# Altium PCB 物联网温度实时监测设备.PcbDoc
Units mm, origin at the board's own origin, x right, y up, seen from the top; angles counter-clockwise.
Board outline 72.25 x 44.68 mm, 2 copper layers (Top Layer, Bottom Layer); 68 components, 49 nets, 275 pads, 138 vias.
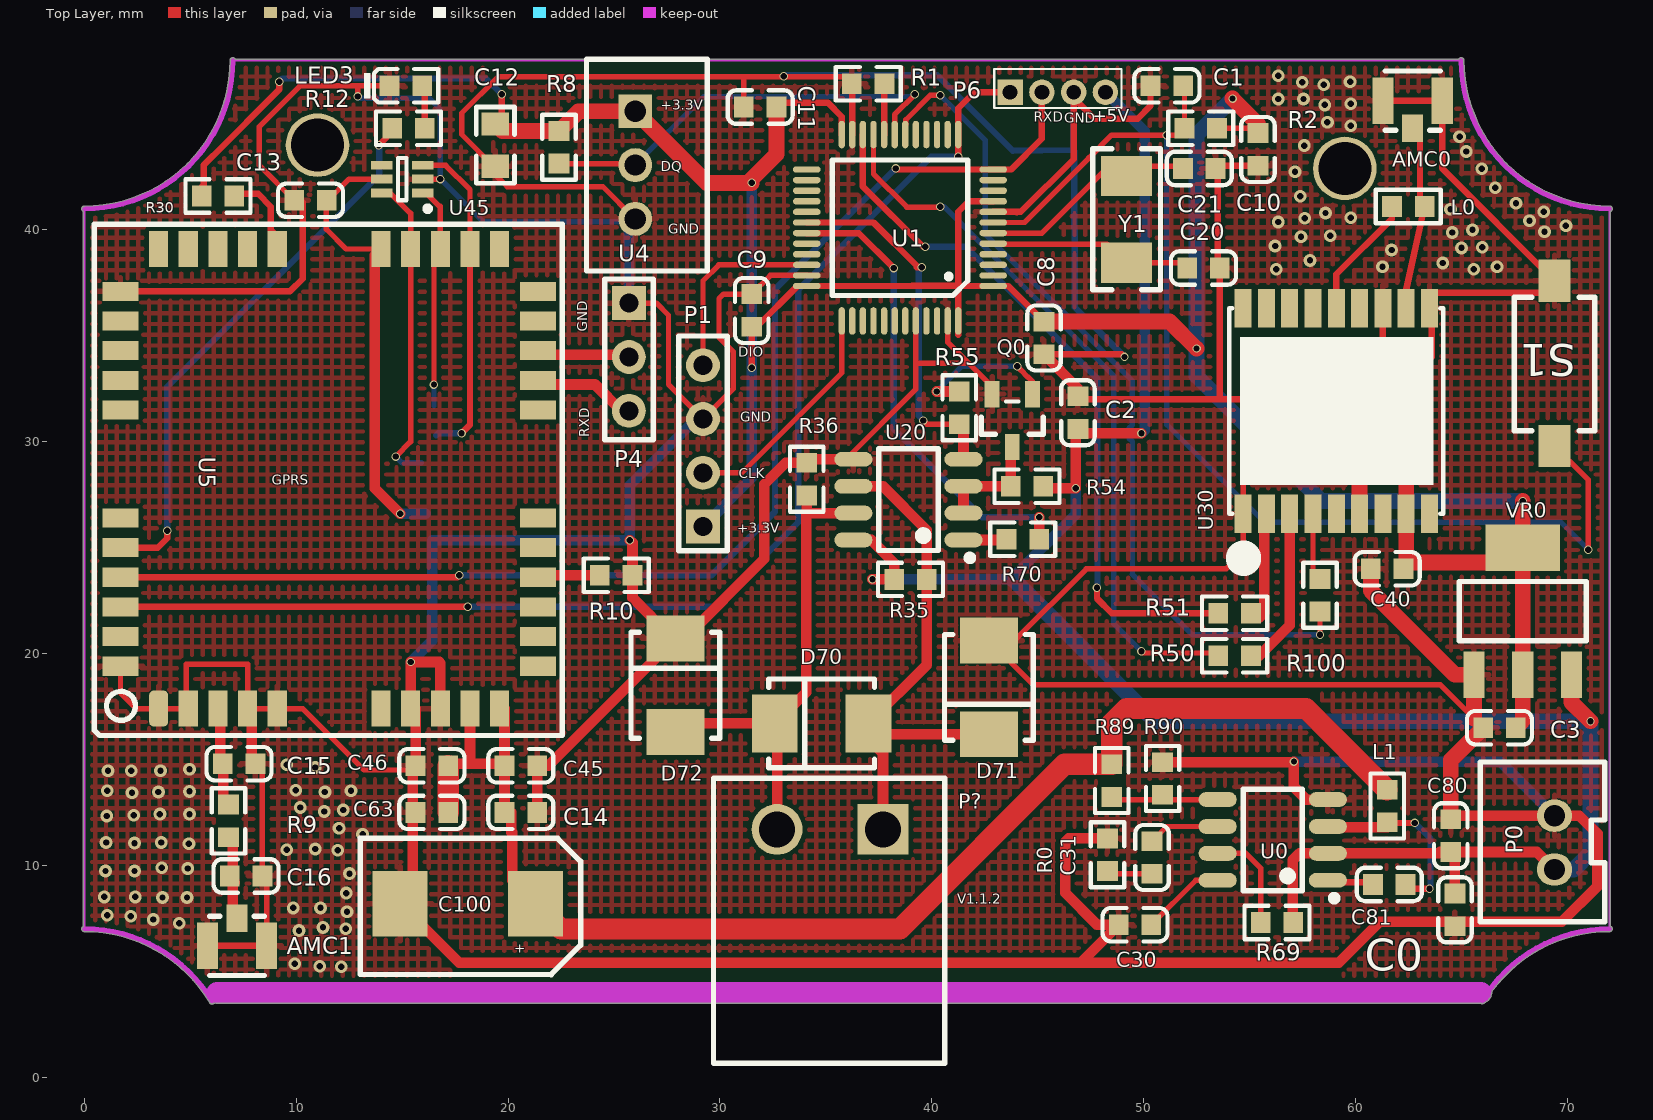
[diagram p0: Top Layer view]
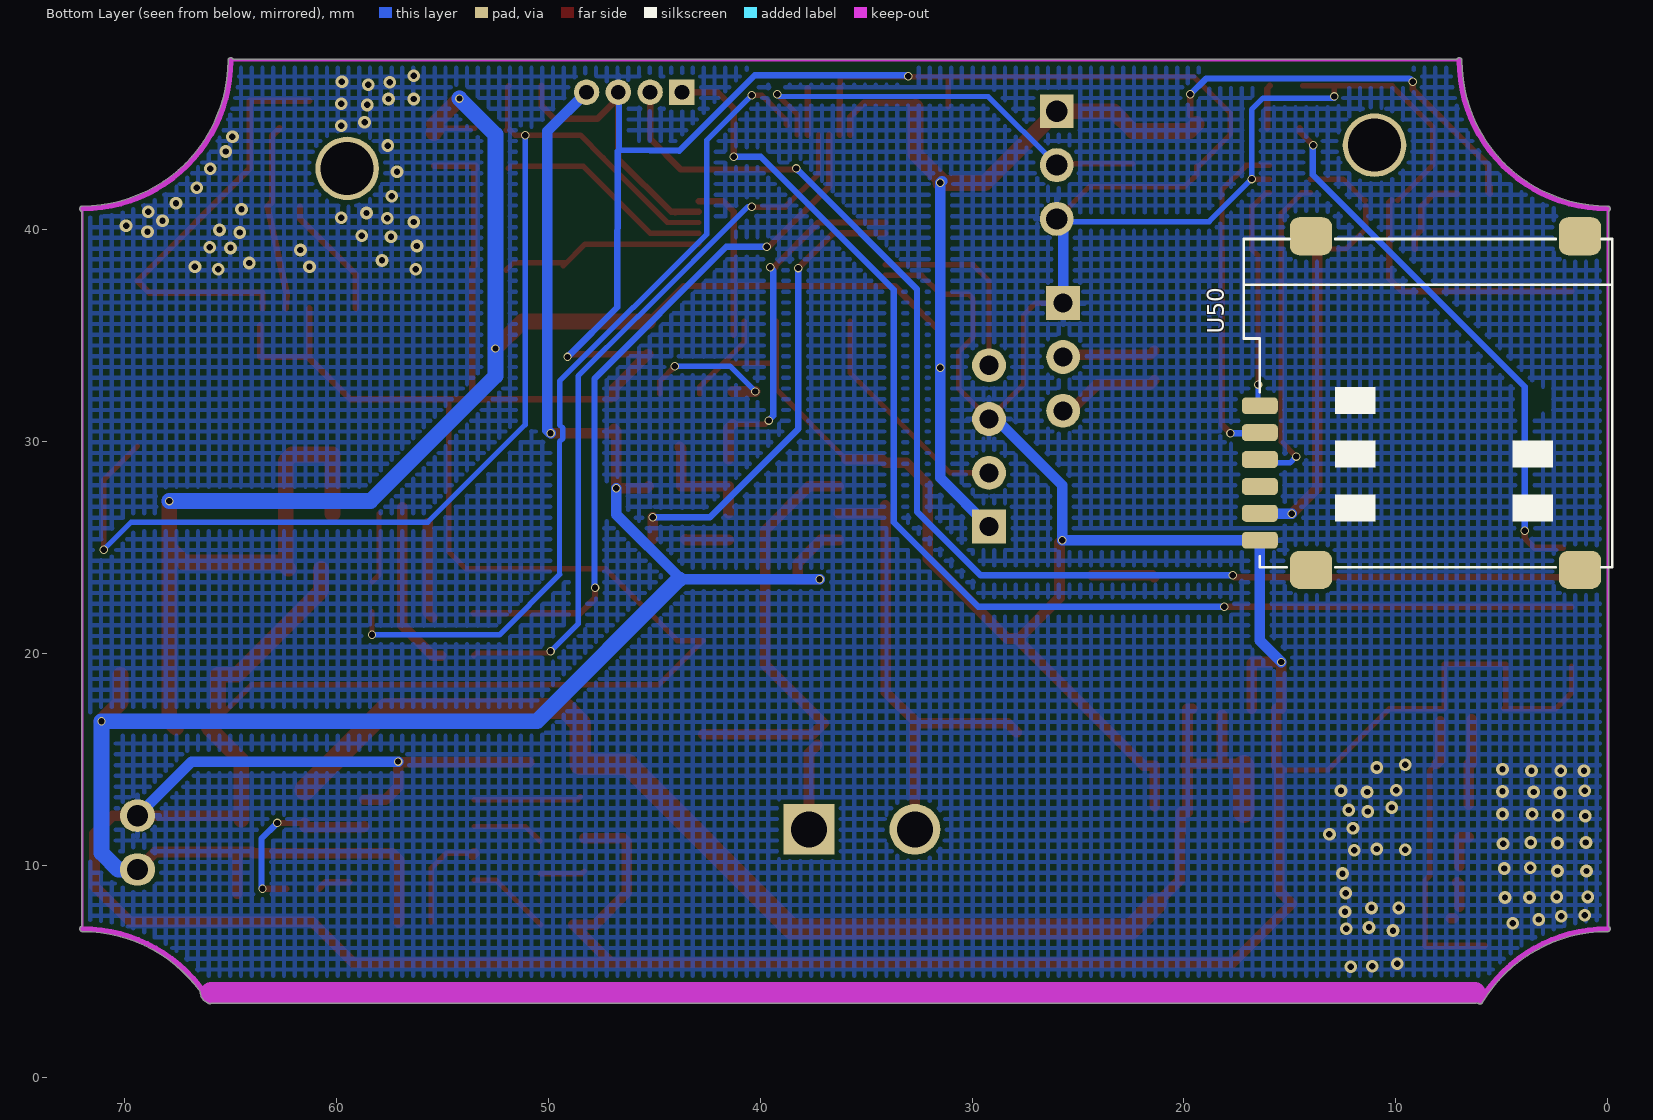
[diagram p1: Bottom Layer view, seen from below]

## Layer stack, top to bottom
Top Solder: solder mask 0.0102, Solder Resist, Dk 3.5
Top Layer: signal copper 0.0356
Dielectric 1: dielectric 0.32, FR-4, Dk 4.8
Bottom Layer: signal copper 0.0356
Bottom Solder: solder mask 0.0102, Solder Resist, Dk 3.5

## Board outline
0,6.873 cw(c0,0) 5.906,3.514 ccw(c6.016,3.579) 6.122,3.509 ccw(c6.26,3.99) 6.26,3.49 65.915,3.49 ccw(c65.991,3.591) 66.095,3.518 ccw(c65.93,3.99) 66.43,3.99 ccw(c65.93,3.99) 66.429,4.025 cw(c72,0) 72,6.873 ccw(c72,7) 72.127,7 ccw(c72,7) 72.04,7.121 72.04,40.879 ccw(c72,41) 72.127,41 ccw(c72,41) 72,41.127 cw(c72,48) 65.127,48 ccw(c65,48) 64.883,48.05 7.117,48.05 ccw(c7,48) 6.873,48 cw(c0,48) 0,41.127 ccw(c0,41) -0.05,40.883 -0.05,7.117 ccw(c0,7)

## Design rules (kind name [scope] priority, off if disabled: settings)
AssemblyTestPointUsage [All] p0: scope1count=1 scope1_0_kind=Board scope1_0_value=Board scope2count=1 scope2_0_kind=Board scope2_0_value=Board commentlength=0
AssemblyTestpoint [All] p0: scope1count=1 scope1_0_kind=Board scope1_0_value=Board scope2count=1 scope2_0_kind=Board scope2_0_value=Board commentlength=0
Clearance [All] p0: scope1count=1 scope1_0_kind=Board scope1_0_value=Board scope2count=1 scope2_0_kind=Board scope2_0_value=Board commentlength=0 gap=0.2
Clearance [All] p1: gap=0.2
ComponentClearance [All] p0: scope1count=1 scope1_0_kind=Board scope1_0_value=Board scope2count=1 scope2_0_kind=Board scope2_0_value=Board commentlength=0 gap=0.254 collisioncheckmode=3
DiffPairsRouting [All] p0: scope1count=1 scope1_0_kind=Board scope1_0_value=Board scope2count=1 scope2_0_kind=Board scope2_0_value=Board commentlength=0
FabricationTestPointUsage [All] p0: scope1count=1 scope1_0_kind=Board scope1_0_value=Board scope2count=1 scope2_0_kind=Board scope2_0_value=Board commentlength=0 valid=0 allowmultiple=FALSE
FabricationTestpoint [All] p0: scope1count=1 scope1_0_kind=Board scope1_0_value=Board scope2count=1 scope2_0_kind=Board scope2_0_value=Board commentlength=0 side=3 testpointundercomponent=TRUE minsize=1.016 maxsize=2.54 preferedsize=1.524 minholesize=0 maxholesize=1.016 preferedholesize=0.813 testpointgrid=0.025
FanoutControl Fanout_BGA [All] p0 off: scope1count=1 scope1_0_kind=Board scope1_0_value=Board scope2count=1 scope2_0_kind=Board scope2_0_value=Board commentlength=69 // Protel DXP Scope 1 Expression Was: IsBGA   Fanout_BGA (Default Rule)
FanoutControl Fanout_LCC [All] p0 off: scope1count=1 scope1_0_kind=Board scope1_0_value=Board scope2count=1 scope2_0_kind=Board scope2_0_value=Board commentlength=69 // Protel DXP Scope 1 Expression Was: IsLCC   Fanout_LCC (Default Rule)
FanoutControl Fanout_SOIC [All] p0 off: scope1count=1 scope1_0_kind=Board scope1_0_value=Board scope2count=1 scope2_0_kind=Board scope2_0_value=Board commentlength=71 // Protel DXP Scope 1 Expression Was: IsSOIC   Fanout_SOIC (Default Rule)
FanoutControl Fanout_Small [All] p0 off: scope1count=1 scope1_0_kind=Board scope1_0_value=Board scope2count=1 scope2_0_kind=Board scope2_0_value=Board commentlength=84 // Protel DXP Scope 1 Expression Was: (CompPinCount < 5)   Fanout_Small (Default Rule)
FanoutControl Fanout_Default [All] p0: scope1count=1 scope1_0_kind=Board scope1_0_value=Board scope2count=1 scope2_0_kind=Board scope2_0_value=Board commentlength=30 // Fanout_Default (Default Rule)
Height [All] p0: scope1count=1 scope1_0_kind=Board scope1_0_value=Board scope2count=1 scope2_0_kind=Board scope2_0_value=Board commentlength=0
HoleSize [All] p0: scope1count=1 scope1_0_kind=Board scope1_0_value=Board scope2count=1 scope2_0_kind=Board scope2_0_value=Board commentlength=0 absolutevalues=TRUE maxlimit=2.54 minlimit=0.025 maxpercent=80.000 minpercent=20.000
HoleToHoleClearance [All] p0: scope1count=1 scope1_0_kind=Board scope1_0_value=Board scope2count=1 scope2_0_kind=Board scope2_0_value=Board commentlength=0
LayerPairs [All] p0: scope1count=1 scope1_0_kind=Board scope1_0_value=Board scope2count=1 scope2_0_kind=Board scope2_0_value=Board commentlength=0 enforce=TRUE
MinimumSolderMaskSliver [All] p0: scope1count=1 scope1_0_kind=Board scope1_0_value=Board scope2count=1 scope2_0_kind=Board scope2_0_value=Board commentlength=0
NetAntennae [All] p0: scope1count=1 scope1_0_kind=Board scope1_0_value=Board scope2count=1 scope2_0_kind=Board scope2_0_value=Board commentlength=0
PasteMaskExpansion [All] p0: scope1count=1 scope1_0_kind=Board scope1_0_value=Board scope2count=1 scope2_0_kind=Board scope2_0_value=Board commentlength=0 expansion=0
PlaneClearance [All] p0: scope1count=1 scope1_0_kind=Board scope1_0_value=Board scope2count=1 scope2_0_kind=Board scope2_0_value=Board commentlength=0 clearance=0.508
PlaneConnect [All] p0: scope1count=1 scope1_0_kind=Board scope1_0_value=Board scope2count=1 scope2_0_kind=Board scope2_0_value=Board commentlength=0 planeconnectstyle=Relief reliefexpansion=0.508 reliefentries=4 reliefconductorwidth=0.254 reliefairgap=0.254
PolygonConnect [All] p0 off: scope1count=1 scope1_0_kind=Board scope1_0_value=Board scope2count=1 scope2_0_kind=Board scope2_0_value=Board commentlength=44 connectstyle=Direct reliefconductorwidth=0.254 reliefentries=4 polygonreliefangle="90 Angle" // Protel DXP Scope 1 Expression Was: IsVia
PolygonConnect [IsVia] p1: connectstyle=Direct reliefconductorwidth=0.254 reliefentries=4 polygonreliefangle="90 Angle" airgapwidth=0.254
RoutingCorners [All] p0: scope1count=1 scope1_0_kind=Board scope1_0_value=Board scope2count=1 scope2_0_kind=Board scope2_0_value=Board commentlength=0 cornerstyle=45-Degree minsetback=2.54 maxsetback=2.54
RoutingLayers [All] p0: scope1count=1 scope1_0_kind=Board scope1_0_value=Board scope2count=1 scope2_0_kind=Board scope2_0_value=Board commentlength=0 top layer=Automatic bottom layer=Automatic
RoutingPriority [All] p0: scope1count=1 scope1_0_kind=Board scope1_0_value=Board scope2count=1 scope2_0_kind=Board scope2_0_value=Board commentlength=0
RoutingTopology [All] p0: scope1count=1 scope1_0_kind=Board scope1_0_value=Board scope2count=1 scope2_0_kind=Board scope2_0_value=Board commentlength=0 topology=Shortest
RoutingVias [All] p0: scope1count=1 scope1_0_kind=Board scope1_0_value=Board scope2count=1 scope2_0_kind=Board scope2_0_value=Board commentlength=0 holewidth=0.3 width=0.4 viastyle="Through Hole" minholewidth=0.3 minwidth=0.4 maxholewidth=0.711 maxwidth=1.27
RoutingVias [All] p1: holewidth=0.3 width=0.4 viastyle="Through Hole" minholewidth=0.3 minwidth=0.4 maxholewidth=0.711 maxwidth=1.27
ShortCircuit [All] p0: scope1count=1 scope1_0_kind=Board scope1_0_value=Board scope2count=1 scope2_0_kind=Board scope2_0_value=Board commentlength=0 allowed=FALSE
SilkToBoardRegionClearance [All] p0: scope1count=1 scope1_0_kind=Board scope1_0_value=Board scope2count=1 scope2_0_kind=Board scope2_0_value=Board commentlength=0
SilkToSilkClearance [All] p0: scope1count=1 scope1_0_kind=Board scope1_0_value=Board scope2count=1 scope2_0_kind=Board scope2_0_value=Board commentlength=0
SilkToSilkClearance [All] p1: silktosilkclearance=0.01
SilkToSolderMaskClearance [All] p0 off: scope1count=1 scope1_0_kind=Board scope1_0_value=Board scope2count=1 scope2_0_kind=Board scope2_0_value=Board commentlength=44 // Protel DXP Scope 1 Expression Was: IsPad
SilkToSolderMaskClearance [IsPad] p1: minsilkscreentomaskgap=0.01 clearancetoexposedcopper=TRUE
SolderMaskExpansion [All] p0: scope1count=1 scope1_0_kind=Board scope1_0_value=Board scope2count=1 scope2_0_kind=Board scope2_0_value=Board commentlength=0 expansion=0.102
SolderMaskExpansion [All] p1: expansion=0.102
UnRoutedNet [All] p0: scope1count=1 scope1_0_kind=Board scope1_0_value=Board scope2count=1 scope2_0_kind=Board scope2_0_value=Board commentlength=0
UnpouredPolygon [All] p0: scope1count=1 scope1_0_kind=Board scope1_0_value=Board scope2count=1 scope2_0_kind=Board scope2_0_value=Board commentlength=0
Width [All] p0: scope1count=1 scope1_0_kind=Board scope1_0_value=Board scope2count=1 scope2_0_kind=Board scope2_0_value=Board commentlength=0 maxlimit=2 minlimit=0.254 preferedwidth=0.254
Width [All] p1: maxlimit=2 minlimit=0.254 preferedwidth=0.254
28 further rules are at their usual default settings.

## Components (designator, comment, footprint, x,y, rotation, side; value= is the part's Value field where it differs from the comment)
AMC0 "Component_1" IPEX 62.7,46.1 r90 top
AMC1 "Component_1" IPEX 7.2,6.2 r270 top
C0 "1uF (105) 10% 50V" 0603_C#1 64.7,7.9 r90 top
C1 "100nF (104) 10% 50V" 0603_C#2 51.1,46.8 r0 top
C2 "100nF (104) 10% 50V" 0603_C#2 46.9,31.37 r90 top
C3 "100nF (104) 10% 50V" 0603_C#2 66.8,16.5 r0 top
C8 "100nF (104) 10% 50V" 0603_C#2 45.3,34.9 r90 top
C9 "100nF (104) 10% 50V" 0603_C#2 31.5,36.2 r270 top
C10 "100nF (104) 10% 50V" 0603_C#2 55.4,43.8 r90 top
C11 "100nF (104) 10% 50V" 0603_C#2 31.9,45.8 r0 top
C12 "100nF(104) 10% 50V" CAPC_0805 19.4,44 r90 top
C13 "1uF (105) 10% 50V" 0603_C#2 10.67,41.4 r0 top
C14 "10nF (103) 10% 50V" 0603_C#2 20.6,12.5 r180 top
C15 "1uF (105) 10% 50V" 0603_C#2 7.3,14.8 r180 top
C16 "1uF (105) 10% 50V" 0603_C#2 7.63,9.5 r180 top
C20 "20pF (200) 5% 50V" 0603_C#2 52.83,38.2 r180 top
C21 "20pF (200) 5% 50V" 0603_C#2 52.63,42.9 r180 top
C30 "3.3nF (332) 10% 50V" 0603_C#2 49.6,7.2 r0 top
C31 "3.3nF (332) 10% 50V" 0603_C#2 50.4,10.37 r270 top
C40 "10uF (106) 10% 10V" 0603_C#2 61.5,24 r180 top
C45 "100nF (104) 10% 50V" 0603_C#2 20.6,14.7 r180 top
C46 "10nF (103) 10% 50V" 0603_C#2 16.4,14.7 r0 top
C63 "22uF (226) 20% 6.3V" 0603_C#2 16.4,12.5 r180 top
C80 "10uF (106) 10% 10V" 0603_C#2 64.5,11.4 r270 top
C81 "10nF (103) 10% 50V" 0603_C#2 61.6,9.1 r180 top
C100 "Cap Pol1" C7361 18.1,8.2 r180 top
D70 "P6SMB6.8CA" SMB(DO-214AA)_S1 34.8,16.7 r0 top
D71 "P6SMB6.8CA" SMB(DO-214AA)_S1 42.7,18.4 r90 top
D72 "P6SMB6.8CA" SMB(DO-214AA)_S1 27.9,18.5 r270 top
L0 "47nH" 0603_L 62.5,41.1 r180 top
L1 "10uH ±10%" 0603_L 61.5,12.8 r270 top
LED3 "蓝灯 0603" 0603_LED_S1 15.17,46.8 r0 top
P0 "HDR-1X2" XH2.54-2 69.4,9.8 r270 top
P1 "SWD下载" "Header 2.54X4" 29.2,29.8 r90 top
P4 "Header 3" "Header 2.54X3" 25.7,34 r270 top
P6 "ZH1.5-4P" ZH1.5-4P 43.7,46.5 r0 top
P? "485接口" 2EDGK-2P 37.7,11.7 r180 top
Q0 "SS8050 Y1" SOT-23(SOT-23-3) 43.8,31 r90 top
R0 "5.6KΩ (5601) ±1%" 0603_R 48.3,10.5 r90 top
R1 "10KΩ (1002) ±1%" 0603_R 37,46.9 r180 top
R2 "10KΩ (1002) ±1%" 0603_R 52.7,44.8 r0 top
R8 "4.7KΩ (4701) ±1%" 0603_R 22.4,43.9 r270 top
R9 "0Ω (0R0) ±1%" 0603_R 6.8,12.1 r270 top
R10 "1KΩ (1001) ±1%" 0603_R 25.1,23.7 r0 top
R12 "20Ω (20R0) ±1%" 0603_R 15.3,44.8 r0 top
R30 "10KΩ (1002) ±1%" 0603_R 6.3,41.6 r0 top
R35 "4.7KΩ (4701) ±1%" 0603_R 39,23.5 r0 top
R36 "4.7KΩ (4701) ±1%" 0603_R 34.1,28.23 r90 top
R50 "0Ω (0R0) ±1%" 0603_R 54.3,19.9 r180 top
R51 "0Ω (0R0) ±1%" 0603_R 54.3,21.9 r180 top
R54 "4.7KΩ (4701) ±1%" 0603_R 44.5,27.9 r0 top
R55 "4.7KΩ (4701) ±1%" 0603_R 41.3,31.6 r90 top
R69 "100KΩ (1003) ±1%" 0603_R 56.3,7.3 r180 top
R70 "1KΩ (1001) ±1%" 0603_R 44.3,25.4 r180 top
R89 "33KΩ (3302) ±1%" 0603_R 48.5,14 r90 top
R90 "10KΩ (1002) ±1%" 0603_R 50.9,14.1 r270 top
R100 "0Ω (0R0) ±1%" 0603_R 58.33,22.75 r270 top
S1 "SW-PB" KEY-SMD1 69.4,29.8 r90 top
U0 "MP1482DS" SOIC-8_150mil 56.1,11.2 r90 top
U1 "STM32F103C8T6" LQFP_48_7X7 38.5,40.1 r90 top
U4 "DS18B20" XH_2.54_3P 26,43.06 r270 top locked
U5 "G510" G510 3.5,17.4 r0 top
U20 "SN75176BDR" SOIC-8_150mil 38.9,27.265 r90 top
U30 "GP-02" GP-02 59.1,31.45 r90 top
U45 "SMF05CT1G" SC-70-6(SOT-363) 15,42.4 r180 top
U50 "SIM_CARD" SIM_MICRO_6P 16.413,25.349 r90 bottom
VR0 "AMS1117-3.3" SOT-223 67.9,22 r270 top locked
Y1 "8MHz ±20ppm 20pF" SMD-5032_2P 49.2,40.5 r90 top

## Footprints (in the part's own frame and the unit in brackets; to place one, negate y for a bottom-side part, rotate by r counter-clockwise, add the part's x,y. Pads: shape width x height; smd on the part's side, far side on the other; paste and mask are expansions set on the pad)
2EDGK-2P [mm]
  rect 2.4x2.4 hole 1.7: 1(0,0)
  round 2.4 hole 1.7: 2(5,0)
  silkscreen extent -2.92,-2.41 8,11.05
0603_C#1 [mm]
  rect 0.93x0.98 smd: 1(-0.77,0) 2(0.77,0)
  Mechanical 13 keep-out region: 23.1,61.812 23.1,60.542 25.005,60.542 25.005,61.812
  silkscreen extent -1.53,-0.79 1.54,0.79
0603_C#2 [mm]
  rect 0.93x0.98 smd: 1(-0.77,0) 2(0.77,0)
  silkscreen extent -1.53,-0.79 1.54,0.79
0603_L [mm]
  rect 0.93x0.98 smd: 1(-0.77,0) 2(0.77,0)
  silkscreen extent -1.53,-0.79 1.54,0.79
0603_LED_S1 [mm]
  rect 0.93x0.98 smd: A(0.77,0) K(-0.77,0)
  silkscreen extent -1.98,-0.79 1.54,0.79
0603_R [mm]
  rect 0.93x0.98 smd: 1(-0.77,0) 2(0.77,0)
  silkscreen extent -1.53,-0.79 1.54,0.79
C7361 [mm] "D型"
  rect 2.6x3.1 smd: 1(-3.202,0.007) 2(3.198,0.007)
  silkscreen extent -5.33,-3.07 5.08,3.36
CAPC_0805 [mm]
  rect 1.1x1.3 smd: 1(-1,0) 2(1,0)
  silkscreen extent -1.8,-0.9 1.8,0.9
G510 [mm]
  rrect50% 0.9x1.7 smd: 1(0,0)
  rect 0.9x1.7 smd: 2(1.4,0) 3(2.8,0) 4(4.2,0) 5(5.6,0) 6(10.5,0) 7(11.9,0) 8(13.3,0) 9(14.7,0) 10(16.1,0) 22(16.1,21.7) 23(14.7,21.7) 24(13.3,21.7) 25(11.9,21.7) 26(10.5,21.7) 27(5.6,21.7) 28(4.2,21.7) 29(2.8,21.7) 30(1.4,21.7) 31(0,21.7)
  rect 1.7x0.9 smd: 11(17.9,2) 12(17.9,3.4) 13(17.9,4.8) 14(17.9,6.2) 15(17.9,7.6) 16(17.9,9) 17(17.9,14.1) 18(17.9,15.5) 19(17.9,16.9) 20(17.9,18.3) 21(17.9,19.7) 32(-1.8,19.7) 33(-1.8,18.3) 34(-1.8,16.9) 35(-1.8,15.5) 36(-1.8,14.1) 37(-1.8,9) 38(-1.8,7.6) 39(-1.8,6.2) 40(-1.8,4.8) 41(-1.8,3.4) 42(-1.8,2)
  silkscreen extent -3.05,-1.27 19.05,22.86
GP-02 [mm]
  rect 1.8x0.8 smd: 1(-4.85,4.4) 2(-4.85,3.3) 3(-4.85,2.2) 4(-4.85,1.1) 5(-4.85,0) 6(-4.85,-1.1) 7(-4.85,-2.2) 8(-4.85,-3.3) 9(-4.85,-4.4) 10(4.85,-4.4) 11(4.85,-3.3) 12(4.85,-2.2) 13(4.85,-1.1) 14(4.85,0) 15(4.85,1.1) 16(4.85,2.2) 17(4.85,3.3) 18(4.85,4.4)
  silkscreen extent -7.29,-5.05 4.85,5.05
"Header 2.54X3" [mm]
  rect 1.6x1.6 hole 0.9: 1(-2.54,0)
  round 1.6 hole 0.9: 2(0,0) 3(2.54,0)
  silkscreen extent -3.68,-1.14 3.9,1.14
"Header 2.54X4" [mm]
  rect 1.6x1.6 hole 0.9: 1(-3.81,0)
  round 1.6 hole 0.9: 2(-1.27,0) 3(1.27,0) 4(3.81,0)
  silkscreen extent -4.95,-1.14 5.19,1.14
IPEX [mm]
  rect 1.3x1 smd: 1(-1.3,0)
  rect 2.2x1 smd: 2(0,1.4) 2(0,-1.4)
  silkscreen extent -1.4,-1.3 1.4,1.3
KEY-SMD1 [mm]
  rect 2x1.5 smd: 1(0,0) 2(7.8,0)
  silkscreen extent 0.73,-1.9 7.03,1.9
LQFP_48_7X7 [mm]
  oval 0.3x1.3 smd: 1(-2.75,-4.4) 2(-2.25,-4.4) 3(-1.75,-4.4) 4(-1.25,-4.4) 5(-0.75,-4.4) 6(-0.25,-4.4) 7(0.25,-4.4) 8(0.75,-4.4) 9(1.25,-4.4) 10(1.75,-4.4) 11(2.25,-4.4) 12(2.75,-4.4) 25(2.75,4.4) 26(2.25,4.4) 27(1.75,4.4) 28(1.25,4.4) 29(0.75,4.4) 30(0.25,4.4) 31(-0.25,4.4) 32(-0.75,4.4) 33(-1.25,4.4) 34(-1.75,4.4) 35(-2.25,4.4) 36(-2.75,4.4)
  oval 1.3x0.3 smd: 13(4.4,-2.75) 14(4.4,-2.25) 15(4.4,-1.75) 16(4.4,-1.25) 17(4.4,-0.75) 18(4.4,-0.25) 19(4.4,0.25) 20(4.4,0.75) 21(4.4,1.25) 22(4.4,1.75) 23(4.4,2.25) 24(4.4,2.75) 37(-4.4,2.75) 38(-4.4,2.25) 39(-4.4,1.75) 40(-4.4,1.25) 41(-4.4,0.75) 42(-4.4,0.25) 43(-4.4,-0.25) 44(-4.4,-0.75) 45(-4.4,-1.25) 46(-4.4,-1.75) 47(-4.4,-2.25) 48(-4.4,-2.75)
  silkscreen extent -3.2,-3.2 3.2,3.2
SC-70-6(SOT-363) [mm]
  rect 1x0.42 smd mask+0: 1(-0.97,0.65) 2(-0.97,0) 3(-0.97,-0.65) 4(0.97,-0.65) 5(0.97,0) 6(0.97,0.65)
  silkscreen extent -1.33,-1 0.2,1.52
SIM_MICRO_6P [mm]
  rrect50% 0.8x1.7 smd: 1(1.27,0) 2(3.81,0) 3(6.35,0) 4(0,0) 5(2.54,0) 6(5.08,0)
  rrect50% 1.8x2 smd: 7(-1.397,-2.413) 8(14.351,-2.413) 9(-1.397,-15.113) 10(14.351,-15.113)
  silkscreen extent -1.27,-16.64 14.22,0.76
SMB(DO-214AA)_S1 [mm]
  rect 2.159x2.743 smd: 1(2.21,0) 2(-2.21,0)
  silkscreen extent -2.5,-2.1 2.5,2.1
SMD-5032_2P [mm]
  rect 1.9x2.4 smd: 1(-2.05,0) 2(2.05,0)
  silkscreen extent -3.32,-1.6 3.32,1.6
SOIC-8_150mil [mm]
  oval 0.7x1.8 smd: 1(-1.905,-2.6) 2(-0.635,-2.6) 3(0.635,-2.6) 4(1.905,-2.6) 5(1.905,2.6) 6(0.635,2.6) 7(-0.635,2.6) 8(-1.905,2.6)
  silkscreen extent -2.9,-3.05 2.4,1.4
SOT-23(SOT-23-3) [mm]
  rect 1.25x0.7 smd: 1(1.25,-0.95) 2(1.25,0.95) 3(-1.25,0)
  silkscreen extent -0.65,-1.46 0.9,1.46
SOT-223 [mm]
  rect 2.2x1 smd: 1(3,-2.3) 2(3,0) 3(3,2.3)
  rect 2.2x3.5 smd: 2(-3,0)
  silkscreen extent -1.4,-3 1.4,3
XH2.54-2 [mil]
  oval 60x65 hole 39.37: 1(0,0) 2(-100.1,0)
  silkscreen extent -200,-138 97,93
XH_2.54_3P [mm]
  rect 1.6x1.6 hole 1: 1(-2.54,0)
  round 1.6 hole 1: 2(0,0) 3(2.54,0)
  silkscreen extent -5,-2.3 5,3.4
ZH1.5-4P [mm] "ZH1.5-4P"
  rect 1.2x1.2 hole 0.7: 1(0,0)
  round 1.2 hole 0.7: 2(1.5,0) 3(3,0) 4(4.5,0)
  silkscreen extent -0.75,-0.75 5.25,1.1

## Part data
AMC0 AMC1: library part Component_1_2
C0 C13 C15 C16: library part "0603 1uF (105) 10% 50V", "贴片电容"
C1 C2 C3 C8 C9 C10 C11 C45: library part "0603 100nF (104) 10% 50V", "贴片电容"
C12: library part "0805 100nF(104) 10% 50V", "贴片电容"
C14 C46 C81: library part "0603 10nF (103) 10% 50V", "贴片电容"
C20 C21: library part "0603 20pF (200) 5% 50V", "贴片电容"
C30 C31: library part "0603 3.3nF (332) 10% 50V", "贴片电容"
C40 C80: library part "0603 10uF (106) 10% 10V", "贴片电容"
C63: library part "0603 22uF (226) 20% 6.3V", "贴片电容"
C100: "Polarized Capacitor (Radial)"
D70 D71 D72: library part "SMB/DO-214AA P6SMB6.8CA", "TVS"
L0: library part "0603 47nH", "贴片电感"
L1: library part "0603 10uH 10%", "贴片电感"
LED3: library part "0603 蓝灯", "发光二极管"
P0: library part "Header 2", "2P接插件"
P1: library part "Header 4", "Header, 4-Pin"
P4: "Header, 3-Pin"
P6: library part "Header 4", "4P接插件"
P?: library part "Header 2", "Header, 2-Pin"
Q0: library part "SOT-23 SS8050 Y1", "三极管"
R0: library part "0603 5.6KΩ (5601) 1%", "贴片电阻"
R1 R2 R30 R90: library part "0603 10KΩ (1002) 1%", "贴片电阻"
R8 R35 R36 R54 R55: library part "0603 4.7KΩ (4701) 1%", "贴片电阻"
R9 R50 R51 R100: library part "0603 0Ω (0R0) 1%", "贴片电阻"
R10 R70: library part "0603 1KΩ (1001) 1%", "贴片电阻"
R12: library part "0603 20Ω (20R0) 1%", "贴片电阻"
R69: library part "0603 100KΩ (1003) 1%", "贴片电阻"
R89: library part "0603 33KΩ (3302) 1%", "贴片电阻"
S1: library part SW-PB_1, "微动开关"
U0: library part MP1482DS_[C14867], "电源芯片"
U1: "ARM"
U4: library part Component_1_3
U5: library part Component_1_1
U20: library part SN75176BDR_[C7063], "RS-485/RS-422"
U45: library part SMF05CT1G_[C15879], "TVS"
VR0: library part "SOT-223 AMS1117-3.3", "低压差线性稳压(LDO)"
Y1: library part "SMD-5032_2P 8MHz 20ppm 20pF", "贴片晶振"

## Free pads (board coordinates)
  round 3 hole 2.5: 0(11,44) 0(59.5,42.9)

## Via types
v1: diameter 0.6, hole 0.3, Top Layer to Bottom Layer, 93 vias
v2: diameter 0.4, hole 0.3, Top Layer to Bottom Layer, 45 vias

## Nets (pads, with @x,y where several pads share a name; then routed paths per layer and width w, separated by ;. In a path a pad name is that pad's centre, name@x,y a point inside that pad or via, vN(x,y) a via of type N, cw(c..) or ccw(c..) an arc to the next point about the centre after c; other vN are vias at no path point)
1pps: R100.2 U1.18 | length 40.1
  Top Layer w0.254: U1.18@38.727,44.93 38.773,44.976 38.773,45.198 39.935,46.36 v2(40.4,46.36) ; v2(58.33,20.88) R100.2
  Bottom Layer w0.254: v2(40.4,46.36) 42.53,44.23 42.53,39.792 45.968,36.354 45.983,36.354 49.473,32.865 49.473,30.789 49.323,30.639 49.323,30.161 49.48,30.004 49.48,23.73 49.47,23.73 52.32,20.88 v2(58.33,20.88)
485_RXD: R55.1 U1.30 U20.4 | length 17.2
  Top Layer w0.254: v2(39.6,31) 39.77,30.83 R55.1
  Top Layer w0.3: U1.30 37.252,40.35 39.3,38.302 39.3,38.231 v2(39.531,38.231)
  Top Layer w0.5: R55.1 41.5,30.63 U20.4
  Bottom Layer w0.3: v2(39.531,38.231) 39.38,38.08 39.38,31.22 v2(39.6,31)
485_TXD: R70.1 U1.31 | length 22
  Top Layer w0.3: U1.31 36.55,39.85 v2(38.2,38.2)
  Top Layer w0.5: R70.1 v2(45.07,26.43)
  Bottom Layer w0.3: v2(38.2,38.2) 38.2,30.6 42.37,26.43 v2(45.07,26.43)
+4V: C14.2 C45.2 C46.2 C63.1 C100.1 L1.1 R89.2 U5.9 U5.10 | length 64.8
  Top Layer w0.5: C46.2 17.17,14.8 18.2,14.8 ; U5.9@18.2,17.1 18.2,14.8 ; U5.10 19.83,17.4 19.83,14.8 18.2,14.8 ; C14.2 19.83,14.63 C45.2@19.9,14.7 ; C14.2@20.155,12.5 20.155,11.56 20.2,11.56 20.2,9.295 C100.1
  Top Layer w1: C63.1 C46.2 ; C100.1 22.495,7 38.5,7 46.27,14.77 R89.2 48.5,16.7 49.2,17.4 57.67,17.4 L1.1
+5V: C0.2 C2.1 C80.2 P0.1 P6.4 R35.1 R54.2 R69.1 U0.2 U20.8 VR0.3 | length 99.4
  Top Layer w0.5: U20.8 37.14,25.36 38.23,24.27 R35.1 v2(37.2,23.5) ; R54.2 45.37,27.8 v2(46.8,27.8) 46.8,30.5 C2.1 47.1,30.4 v2(49.9,30.4) ; R69.1 57.05,7.32 57.05,10.25 57.365,10.565 U0.2 63.935,10.565 64,10.63 C80.2 ; C0.2 64.7,10.43 C80.2 ; P0.1 68.57,10.63 C80.2
  Top Layer w0.75: VR0.3 70.2,17.701 v2(71.101,16.8)
  Bottom Layer w0.5: v2(37.2,23.5) 43.735,23.5 46.8,26.565 v2(46.8,27.8) ; P6.4 50.05,44.65 50.05,30.55 v2(49.9,30.4)
  Bottom Layer w0.75: 43.84,23.5 50.54,16.8 v2(71.101,16.8) 71.101,10.59 70.31,9.8 P0.1
DS18B20: R8.2 U1.19 U4.2 | length 20.5
  Top Layer w0.254: R8.2 25.93,43.13 U4.2 ; U1.19 38.25,45.45 v2(39.2,46.4)
  Bottom Layer w0.254: U4.2 29.24,46.3 39.1,46.3 v2(39.2,46.4)
GND: AMC0.2 AMC1.2 C0.1 C1.1 C2.2 C3.1 C8.1 C9.1 C10.1 C11.1 C12.1 C13.1 C14.1 C15.1 C16.1 C20.1 C21.1 C30.1 C40.2 C45.1 C46.1 C63.2 C80.1 C100.2 D71.1 D72.2 LED3.K P0.2 P1.3 P4.1 P6.3 Q0.2 R0.2 R1.2 R10.2 R36.2 R90.1 S1.2 U0.4 U1.8 U1.23 U1.35 U1.44 U1.47 U4.3 U5.1 U5.2 U5.4 U5.5 U5.7 U5.8 U5.32 U5.42 U20.5 U30.1 U30.10 U30.12 U45.2 U50.4 VR0.1 | length 482.9
  Top Layer w0.254: U5.42 1.7,18.14 2.44,17.4 U5.1 U5.2@4.8,17.4 ; U5.2 U5.2@4.8,17.4 ; C15.1 8.4,14.47 C16.1 8.6,9.3 AMC1.2@8.6,6.2 ; C13.1 8.253,43.047 8.253,44.883 10.17,46.8 13,46.8 ; v2(12.9,46.3) 12.9,46.7 13,46.8 ; LED3.K 13,46.8 ; C46.1@15.43,14.5 13.2,14.5 10.3,17.4 U5.5 U5.4 7.7,19.5 4.8,19.5 U5.2@4.8,17.4 ; U45.2 v2(16.8,42.4) ; P4.1 27,36.54 27.57,35.97 27.57,32.7 P1.3 30.627,32.497 30.627,34.255 29.954,34.928 29.954,36.754 30.17,36.97 C9.1 32.38,37.85 U1.35 ; U4.3 24.482,42.038 19.962,42.038 19.4,42.6 C12.1 19.313,43 17.81,44.503 17.81,45.51 19.527,47.227 31.12,47.227 ; C11.1 31.13,47.217 31.12,47.227 ; U20.5@35.88,29.1 35.88,29.11 35.94,29.17 39.25,32.48 39.25,33.7 ; R1.2 36.23,47.227 31.12,47.227 ; U1.44 39.25,33.7 ; U1.47 40.75,34.7 41.655,33.795 ; Q0.2 42.85,32.6 41.655,33.795 ; 54.7,32 U30.1 54.7,24.8 53.9,24 47.3,24 43.91,20.61 D71.1 44.783,18.527 64.003,18.527 65.6,16.93 C3.1 ; 39.25,33.7 41.56,33.7 41.655,33.795
  Top Layer w0.3: U5.32 9.7,37.1 10.3,37.7 10.3,41.3 C13.1@10.2,41.4 ; AMC1.2@5.8,6.2 AMC1.2@8.6,6.2 ; R1.2@36.23,46.7 36.25,46.68 U1.23 ; U1.8 44.035,40.85 ; 44.017,40.833 44.035,40.85 ; C8.1 48.97,34.13 v2(49.1,34) ; C2.2 47.04,32 53.6,32 ; C1.1 50.33,45.86 49.72,45.25 47.682,45.25 46.95,45.982 46.95,46.25 P6.3 46.7,43.34 44.21,40.85 44.035,40.85 ; C21.1 53.5,42.8 C20.1@53.5,38.3 ; C21.1@53.43,43.03 C10.1 ; C20.1 53.6,32 ; U30.12 61.3,34.05 61.35,34 ; AMC0.2@61.3,46.1 64.1,46.1 64.1,42.9 S1.2@69.3,37.7 ; U30.10 63.5,37.04 68.84,37.04 S1.2 ; U30.10@63.6,35.5 63.6,34 61.35,34 ; 53.6,32 54.7,32 59.35,32 61.35,34
  Top Layer w0.5: U5.4@7.9,16.8 7.9,14.97 C15.1 ; U5.8 16.8,19.54 16.74,19.6 v2(15.4,19.6) U5.7 15.63,17.4 C46.1 15.43,14.5 15.5,14.43 15.5,8.791 C100.2 17.695,5.4 47.03,5.4 ; C14.1@21.37,12.8 C45.1 21.89,14.7 D72.2@27.7,20.51 ; v2(25.749,25.349) 25.87,25.228 R10.2 25.87,22.63 27.7,20.8 D72.2@27.7,20.51 ; U20.5@35.94,29.17 34.27,29.17 R36.2 33.1,29 32.1,28 32.1,24.47 28.34,20.71 D72.2 D72.2@27.7,20.51 ; C8.1 46.9,32.53 C2.2 ; R0.2 46.47,11.27 46.3,11.1 46.3,8.7 47.8,7.2 C30.1 47.03,5.4 ; R90.1 57.07,14.87 v2(57.1,14.9) 57.1,13.7 57.695,13.105 U0.4 ; C80.1@64.5,12.343 P0.2 70.577,12.343 71.43,11.49 71.43,9.01 69.75,7.33 69.18,7.33 69.174,7.336 61.154,7.336 59.218,5.4 47.03,5.4
  Top Layer w0.75: C40.2 60.73,22.97 64.7,19 VR0.1 C3.1@65.6,16.93 ; C80.1 64.5,12.343 64.5,14.97 C3.1
  Bottom Layer w0.254: v2(12.9,46.3) 12.9,46.223 16.257,46.223 16.8,45.68 v2(16.8,42.4) 18.81,40.39 25.87,40.39 U4.3
  Bottom Layer w0.3: v2(33.01,47.25) 33.06,47.3 40.26,47.3 43.82,43.74 46.67,43.77 ; P6.3@46.67,46.53 46.67,43.77 ; v2(49.1,34) 46.757,36.343 46.727,43.714 46.67,43.77
  Bottom Layer w0.5: v2(15.4,19.6) 16.413,20.613 U50.4 v2(25.749,25.349) 25.749,27.949 P1.3@29,31.2 ; P4.1 25.7,40.1 U4.3@26.1,40.5 ; v2(57.1,14.9) 66.843,14.9 P0.2
  other v1: 12.12,5.21 11.11,5.24 9.92,5.36 10.13,6.92 12.33,7.01 11.26,7.07 4.47,7.26 3.25,7.44 2.18,7.59 1.08,7.65 12.39,7.81 9.85,7.99 11.14,7.99 3.68,8.48 4.84,8.48 0.93,8.51 2.39,8.51 12.36,8.69 12.51,9.61 0.99,9.73 2.36,9.73 4.87,9.85 3.65,9.88 11.96,10.71 9.55,10.74 10.89,10.77 4.93,11.02 2.36,11.05 1.02,11.08 3.62,11.08 13.13,11.47 12.02,11.75 1.05,12.33 2.33,12.36 3.56,12.42 4.96,12.42 11.32,12.54 12.21,12.61 10.19,12.73 2.24,13.43 3.49,13.46 11.35,13.46 4.96,13.49 1.08,13.52 12.58,13.52 9.98,13.55 1.11,14.47 2.21,14.47 3.59,14.47 4.96,14.53 10.89,14.62 9.55,14.75 56.27,38.14 65.59,38.14 61.28,38.26 66.69,38.26 64.13,38.44 57.86,38.56 61.71,39.05 65.01,39.15 65.99,39.18 56.21,39.24 57.43,39.67 58.81,39.73 64.58,39.88 68.93,39.91 65.53,40 69.94,40.19 56.36,40.37 68.22,40.43 57.61,40.55 59.78,40.58 58.59,40.8 68.9,40.86 64.49,40.98 67.58,41.26 57.4,41.59 66.6,41.99 57.15,42.75 65.96,42.88 65.23,43.7 57.58,43.98 64.92,44.4 59.78,44.92 58.68,45.08 58.56,45.9 59.78,45.96 56.36,46.18 57.55,46.18 58.5,46.85 57.49,46.97 59.75,47 56.36,47.28
NetAMC0_1: AMC0.1 L0.1 U30.11 | length 8.8
  Top Layer w0.3: U30.11 62.35,36.98 L0.1 63.05,41.32 63.05,44.45 AMC0.1
NetAMC1_1: AMC1.1 C16.2 R9.2 | length 3.1
  Top Layer w0.5: R9.2@6.555,11.33 R9.2 6.99,11.33 C16.2@6.99,9.96 ; AMC1.1@7,8.05 7,9.1 C16.2@7.1,9.2 ; AMC1.1@7.25,7.5 AMC1.1@7.4,7.5
NetC15_2: C15.2 R9.1 U5.3 | length 4.2
  Top Layer w0.5: U5.3@6.4,16.9 6.4,14.8 C15.2 6.555,14.8 R9.1@6.555,12.87
NetC30_2: C30.2 U0.8 | length 4
  Top Layer w0.254: C30.2 52.465,9.295 U0.8
NetC31_1: C31.1 U0.6 | length 3.4
  Top Layer w0.254: C31.1 51.095,11.835 U0.6
NetC31_2: C31.2 R0.1 | length 2.2
  Top Layer w0.254: R0.1 48.43,9.6 C31.2
NetC81_1: C81.1 L1.2 U0.3 | length 8.9
  Top Layer w0.3: L1.2@61.5,12 v2(62.8,12) ; C81.1@62.37,8.9 v2(63.5,8.9)
  Top Layer w0.5: U0.3 58.735,11.8 61.5,11.8 L1.2@61.5,12
  Bottom Layer w0.3: v2(62.8,12) 63.55,11.25 63.55,8.95 v2(63.5,8.9)
NetC81_2: C81.2 U0.1 | length 1.6
  Top Layer w0.3: U0.1@59.4,9.2 60.53,9.2 C81.2@60.83,8.9
NetD70_1: D70.1 D71.2 P?.1 R35.2 U20.6 | length 24.7
  Top Layer w0.5: U20.6 37.699,27.9 39.77,25.829 R35.2 39.77,19.46 D70.1 37.52,16.19 D71.2 ; D70.1@37.3,15.7 37.7,15.3 P?.1
NetD70_2: D70.2 D72.1 P?.2 R36.1 U20.7 | length 23
  Top Layer w0.5: D72.1 28.31,16.7 D70.2 ; P?.2 32.7,16.59 D70.2 ; R36.1@34.1,27 34.1,26.63 ; U20.7 34.1,26.63 ; D70.2 34.07,18.18 34.07,26.6 34.1,26.63
NetL0_2: L0.2 U30.14 | length 5.9
  Top Layer w0.3: U30.14 59.1,37.9 61.73,40.53 L0.2
NetLED3_A: LED3.A R12.2 | length 2.1
  Top Layer w0.3: LED3.A 16.07,46.67 R12.2
NetQ0_1: Q0.1 R55.2 | length 7
  Top Layer w0.254: v2(44.03,33.57) 44.183,33.417 44.183,33.405 44.55,33.038 44.562,33.038 44.75,32.85 Q0.1
  Top Layer w0.5: v2(40.23,32.37) R55.2
  Bottom Layer w0.254: v2(40.23,32.37) 41.43,33.57 v2(44.03,33.57)
NetQ0_3: Q0.3 R54.1 U20.2 U20.3 | length 5.4
  Top Layer w0.5: U20.2 U20.3 R54.1 43.73,29.68 Q0.3
NetR1_1: R1.1 U1.20 | length 2.2
  Top Layer w0.3: U1.20 37.75,46.68 R1.1@37.77,46.7
NetR10_1: R10.1 U5.14 | length 3
  Top Layer w0.5: U5.14 21.5,23.7 R10.1
NetR12_1: R12.1 U5.38 | length 25.8
  Top Layer w0.3: U5.38@2.1,25 3.46,25 3.9,25.44 v2(3.9,25.8) ; v2(13.9,44) 14.53,44.63 R12.1
  Bottom Layer w0.3: v2(3.9,25.8) 3.9,32.6 13.91,42.61 13.91,43.99 v2(13.9,44)
NetR50_1: R50.1 U30.3 | length 7.9
  Top Layer w0.5: R50.1 R50.1@55.4,19.9 ; R50.1@55.47,19.9 56.9,21.33 U30.3@56.9,26.9
NetR51_1: R51.1 U30.2 | length 4.5
  Top Layer w0.5: R51.1@55.485,21.715 55.7,21.93 U30.2@55.7,26.15
NetR69_2: R69.2 U0.7 | length 5
  Top Layer w0.254: U0.7 54.835,10.565 55.53,9.87 R69.2
  Top Layer w0.5: U0.7 U0.7@53.565,10.5
NetR70_2: R70.2 U20.1 | length 2
  Top Layer w0.5: U20.1 43.49,25.36 R70.2
NetR89_1: R89.1 R90.2 U0.5 | length 5.1
  Top Layer w0.254: R89.1 48.625,13.105 U0.5
NetR100_1: R100.1 U30.4 | length 3.4
  Top Layer w0.254: U30.4 58,23.71 R100.1@58.33,23.38
NRST: C1.2 R2.1 S1.1 U1.7 | length 54.6
  Top Layer w0.254: U1.7 44.385,40.35 47.42,43.385 47.42,43.4 48.493,44.473 v2(51.1,44.473) 51.573,44.473 R2.1@51.9,44.8 ; C1.2 51.93,46.74 R2.1 R2.1@51.9,44.8 ; R2.1@52,44.7 R2.1@51.9,44.8 ; S1.1 71,28.2 v2(71,24.9)
  Bottom Layer w0.254: v2(51.1,44.473) 51.1,30.8 55.702,26.198 69.702,26.198 v2(71,24.9)
"OSC 8IN": C20.2 U1.5 Y1.1 | length 9.8
  Top Layer w0.254: U1.5 42.923,39.327 48.273,39.327 Y1.1@49.3,38.3 ; Y1.1 51.65,38.45 C20.2@52,38.1
"OSC 8OUT": C21.2 U1.6 Y1.2 | length 10.3
  Top Layer w0.254: U1.6 45.2,39.85 48.35,43 51.8,43 C21.2@51.9,42.9
"OSC 32.7IN": U1.3
"OSC 32.7OUT": U1.4
RXD2: P4.3 U5.18 | length 4.9
  Top Layer w0.5: U5.18 21.6,32.7 24.1,32.7 25.34,31.46 P4.3
SIM_CD: R30.2 U5.27 | length 4.1
  Top Layer w0.3: R30.2@7.1,41.7 8.2,41.7 8.8,41.1 8.8,40 9.1,39.7 U5.27
SIM_CLK: U5.24 U45.1 U50.3 | length 10.6
  Top Layer w0.254: U45.1 16.13,41.75 16.77,41.11 ; v2(16.5,32.7) 16.5,38.8 U5.24 16.8,41.12
  Bottom Layer w0.254: U50.3@16.5,31.7 v2(16.5,32.7)
SIM_DATA: U5.23 U45.3 U50.6 | length 15.6
  Top Layer w0.254: U45.3 17.05,43.05 18.2,41.9 U5.23
  Top Layer w0.3: v2(17.8,30.4) 18.2,30.8 U5.23
  Bottom Layer w0.3: U50.6@16.6,30.3 16.7,30.4 v2(17.8,30.4)
SIM_RST: U5.25 U45.6 U50.2 | length 14.9
  Top Layer w0.254: U45.6 14.43,41.75 15.4,40.78 U5.25 15.4,30 v2(14.7,29.3)
  Bottom Layer w0.254: v2(14.7,29.3) 15,29 U50.2@15.9,29
SIM_VSIM: C13.2 U5.26 U45.5 U50.1 | length 21.4
  Top Layer w0.254: C13.2@11.42,41.15 11.42,40.03 12.35,39.1 U5.26 U5.26@13.7,38.8 ; C13.2 11.49,41.4 12.49,42.4 U45.5
  Top Layer w0.5: U5.26@13.7,38.8 13.7,27.8 v2(14.9,26.6)
  Bottom Layer w0.5: v2(14.9,26.6) U50.1@16.1,26.6
SWCLK: P1.2 U1.37 | length 11
  Top Layer w0.254: P1.2 31.03,28.53 35.75,33.25 U1.37
SWDIO: P1.4 U1.34 | length 9.2
  Top Layer w0.254: P1.4 29.2,37.6 29.95,38.35 U1.34
TXD2: P4.2 U5.19 | length 4.5
  Top Layer w0.5: U5.19 21.6,34.1 25.7,34.1 P4.2
UART2_RXD: P6.2 U1.12 U5.39 | length 60.5
  Top Layer w0.3: U5.39 17.6,23.6 v2(17.7,23.7) ; v2(38.3,42.9) 38.35,42.85 U1.12 43.75,42.85 45.2,44.3 P6.2
  Bottom Layer w0.3: v2(17.7,23.7) 29.6,23.7 32.6,26.7 32.6,37.2 37.95,42.55 v2(38.3,42.9)
UART2_TXD: P6.1 U1.13 U5.40 | length 59.8
  Top Layer w0.3: U5.40 v2(18.1,22.2) ; v2(41.25,43.45) U1.13 41.25,45.75 42,46.5 P6.1
  Bottom Layer w0.3: v2(18.1,22.2) 29.7,22.2 33.7,26.2 33.7,37.18 39.97,43.45 v2(41.25,43.45)
UART3_RXD: R50.2 U1.21 | length 34.4
  Top Layer w0.254: U1.21 37.25,42.649 38.826,41.073 40.373,41.073 v2(40.4,41.1) ; v2(49.9,20.1) 49.973,20.027 53.403,20.027 R50.2
  Bottom Layer w0.254: v2(40.4,41.1) 40.58,41.1 45.78,35.9 45.795,35.9 48.6,33.096 48.6,21.4 v2(49.9,20.1)
UART3_TXD: R51.2 U1.22 | length 33.6
  Top Layer w0.3: U1.22 36.75,42.05 39.6,39.2 v2(39.7,39.2) ; v2(47.8,23.1) 47.8,22.6 48.5,21.9 R51.2
  Bottom Layer w0.3: v2(39.7,39.2) 41.6,39.2 47.823,32.977 v2@47.823,23.2
VCC_3.3V: C3.2 C8.2 C9.2 C10.2 C11.2 C12.2 C40.1 P1.1 R2.2 R8.1 R30.1 U1.1 U1.9 U1.24 U1.36 U1.48 U4.1 U30.6 U30.8 VR0.2 | length 153.8
  Top Layer w0.254: R2.2 C10.2@55.23,44.8 ; C10.2@55.4,44.99 55.4,44.8 C10.2@55.5,44.7
  Top Layer w0.3: R30.1@5.56,42.06 5.56,41.7 5.63,41.77 5.63,43.063 5.651,43.085 5.651,43.088 6.068,43.505 6.075,43.505 9.2,46.63 v2(9.2,47) ; C12.2@19.7,45.4 v2(19.7,46.4) ; v2(31.5,33.5) C9.2 31.74,35.43 33.66,37.35 U1.36 39.059,37.35 39.069,37.36 41.19,37.36 41.195,37.365 ; C11.2@32.9,46 35.1,46 35.75,45.35 U1.24 ; 41.18,37.38 41.195,37.365 ; U1.48@41.25,35.05 U1.48 41.25,37.31 41.195,37.365 ; U1.9 41.75,41.35 41.25,40.85 41.25,37.42 ; C8.2 43.62,37.35 U1.1 41.21,37.35 41.25,37.39 41.25,37.42 ; 41.195,37.365 41.25,37.42
  Top Layer w0.75: C12.2 19.73,44.67 R8.1 23.33,45.6 U4.1 29.38,42.22 v2(31.5,42.22) ; v2@31.41,42.31 32.67,43.57 C11.2 ; C8.2 51.23,35.67 v2(52.5,34.4) ; v2(54.2,46.2) 54.2,46.19 C10.2@55.4,44.99 ; C10.2@55.23,44.8 55.43,44.6 C10.2 ; U30.6 60.2,29.4 62.1,29.4 62.4,29.1 U30.8 C40.1@62.4,24.13 ; C40.1 C40.1@62.4,24.13 ; C3.2 67.9,16.83 67.9,19 VR0.2@67.9,25 ; v2(67.9,27.2) VR0.2@67.9,25 ; C40.1@62.4,24.13 62.57,24.3 67.2,24.3 VR0.2@67.9,25
  Bottom Layer w0.3: v2(9.2,47) 9.35,47.15 18.95,47.15 v2(19.7,46.4)
  Bottom Layer w0.5: P1.1 31.5,28.29 v2(31.5,33.5) v2(31.5,42.22) v2@31.42,42.3
  Bottom Layer w0.75: v2(54.2,46.2) 52.5,44.5 v2(52.5,34.4) 52.5,33.1 58.4,27.2 v2(67.9,27.2)
pads on no net: U1.2 U1.10 U1.11 U1.14 U1.15 U1.16 U1.17 U1.25 U1.26 U1.27 U1.28 U1.29 U1.32 U1.33 U1.38 U1.39 U1.40 U1.41 U1.42 U1.43 U1.45 U1.46 U5.6 U5.11 U5.12 U5.13 U5.15 U5.16 U5.17 U5.20 U5.21 U5.22 U5.28 U5.29 U5.30 U5.31 U5.33 U5.34 U5.35 U5.36 U5.37 U5.41 U30.5 U30.7 U30.9 U30.13 U30.15 U30.16 U30.17 U30.18 U45.4 U50.5 U50.7 U50.8 U50.9 U50.10

## Polygon pours and split planes (outlines as drawn)
GND on Top Layer "Top Layer-No Net" (hatched 90Degree grid 0.508 track 0.203, remove dead copper, pour order 0): 6.97,47.93 7.06,47.84 64.98,47.84 64.98,47.75 71.88,40.85 71.88,7.01 69.19,7.01 65.79,3.61 6.16,3.61 2.85,6.92 0.03,6.92 0.07,6.96 0.07,40.99 6.6,47.52 7.01,47.52
GND on Bottom Layer "Top Layer-No Net" (hatched 90Degree grid 0.508 track 0.203, remove dead copper, pour order 2): 7.03,48.01 7.2,47.84 65.03,47.84 71.96,40.91 71.96,7.24 71.73,7.01 69.28,7.01 66.11,3.84 5.67,3.84 5.65,3.82 2.48,6.99 -0.01,6.99 -0.05,7.03 -0.05,40.84 0.03,40.84 7.05,47.86

## Keep-outs
Keep-Out Layer:
  lines w0.1: 0,7 0,41 ; 7,48 65,48 ; 71.99,6.99 71.99,40.99
  lines w0.254: 0,7 cw(c0,0) 6.016,3.579 ; 0,41 ccw(c0,48) 7,48 ; 65,48 ccw(c72,48) 72,41 ; 65.991,3.591 cw(c72,0) 72,7
  lines w1: 11,4 6.25,4 6.26,3.99 65.93,3.99

## Silkscreen, mask and mechanical layers (free items; w line width, h text height)
Top Overlay:
  text "+3.3V" at 27.2,45.5 h0.8
  text "RXD" at 44.81,44.95 h0.8
  text "+5V" at 47.6,44.9 h1
  text "GND" at 46.26,44.89 h0.8
  text "DQ" at 27.199,42.6 h0.8
  text "GND" at 27.55,39.66 h0.8
  text "GND" at 23.9,35.2 h0.8 r90
  text "DIO" at 30.86,33.85 h0.8
  text "GND" at 30.95,30.78 h0.8
  text "RXD" at 24,30.2 h0.8 r90
  text "CLK" at 30.89,28.1 h0.8
  text "+3.3V" at 30.81,25.53 h0.8
  text "V1.1.2" at 41.21,8.02 h0.8
  text "+" at 20.3,5.7 h0.8

## Text inside footprints (layer, text, board x,y; h text height)
U5: Top Overlay "GPRS" at 8.834,27.814 h0.8